# Altium PCB PCB1.PcbDoc
Units mm, origin at the board's own origin, x right, y up, seen from the top; angles counter-clockwise.
Board outline 60 x 72.9 mm, 2 copper layers (Top Layer, Bottom Layer); 114 components, 58 nets, 284 pads, 61 vias.
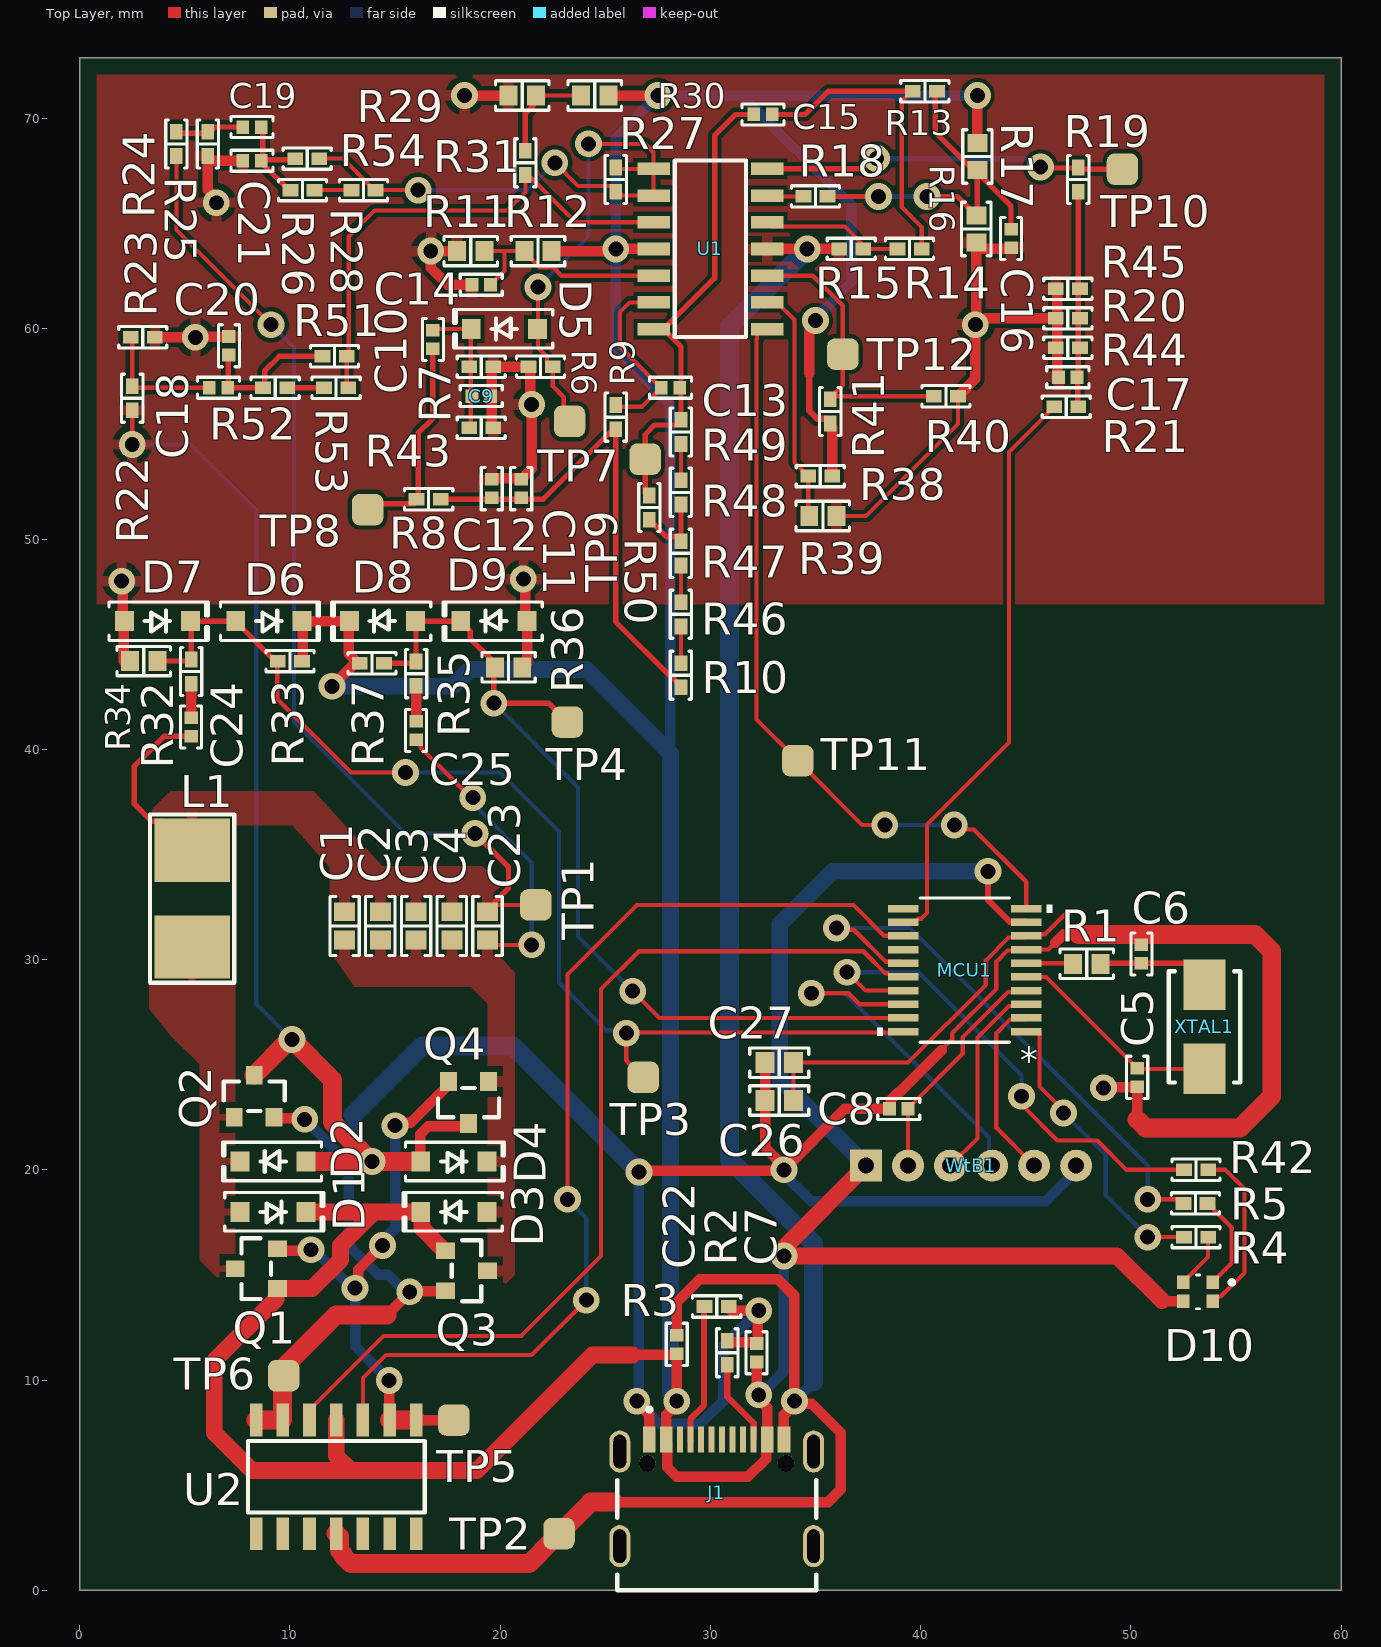
[diagram p0: Top Layer view]
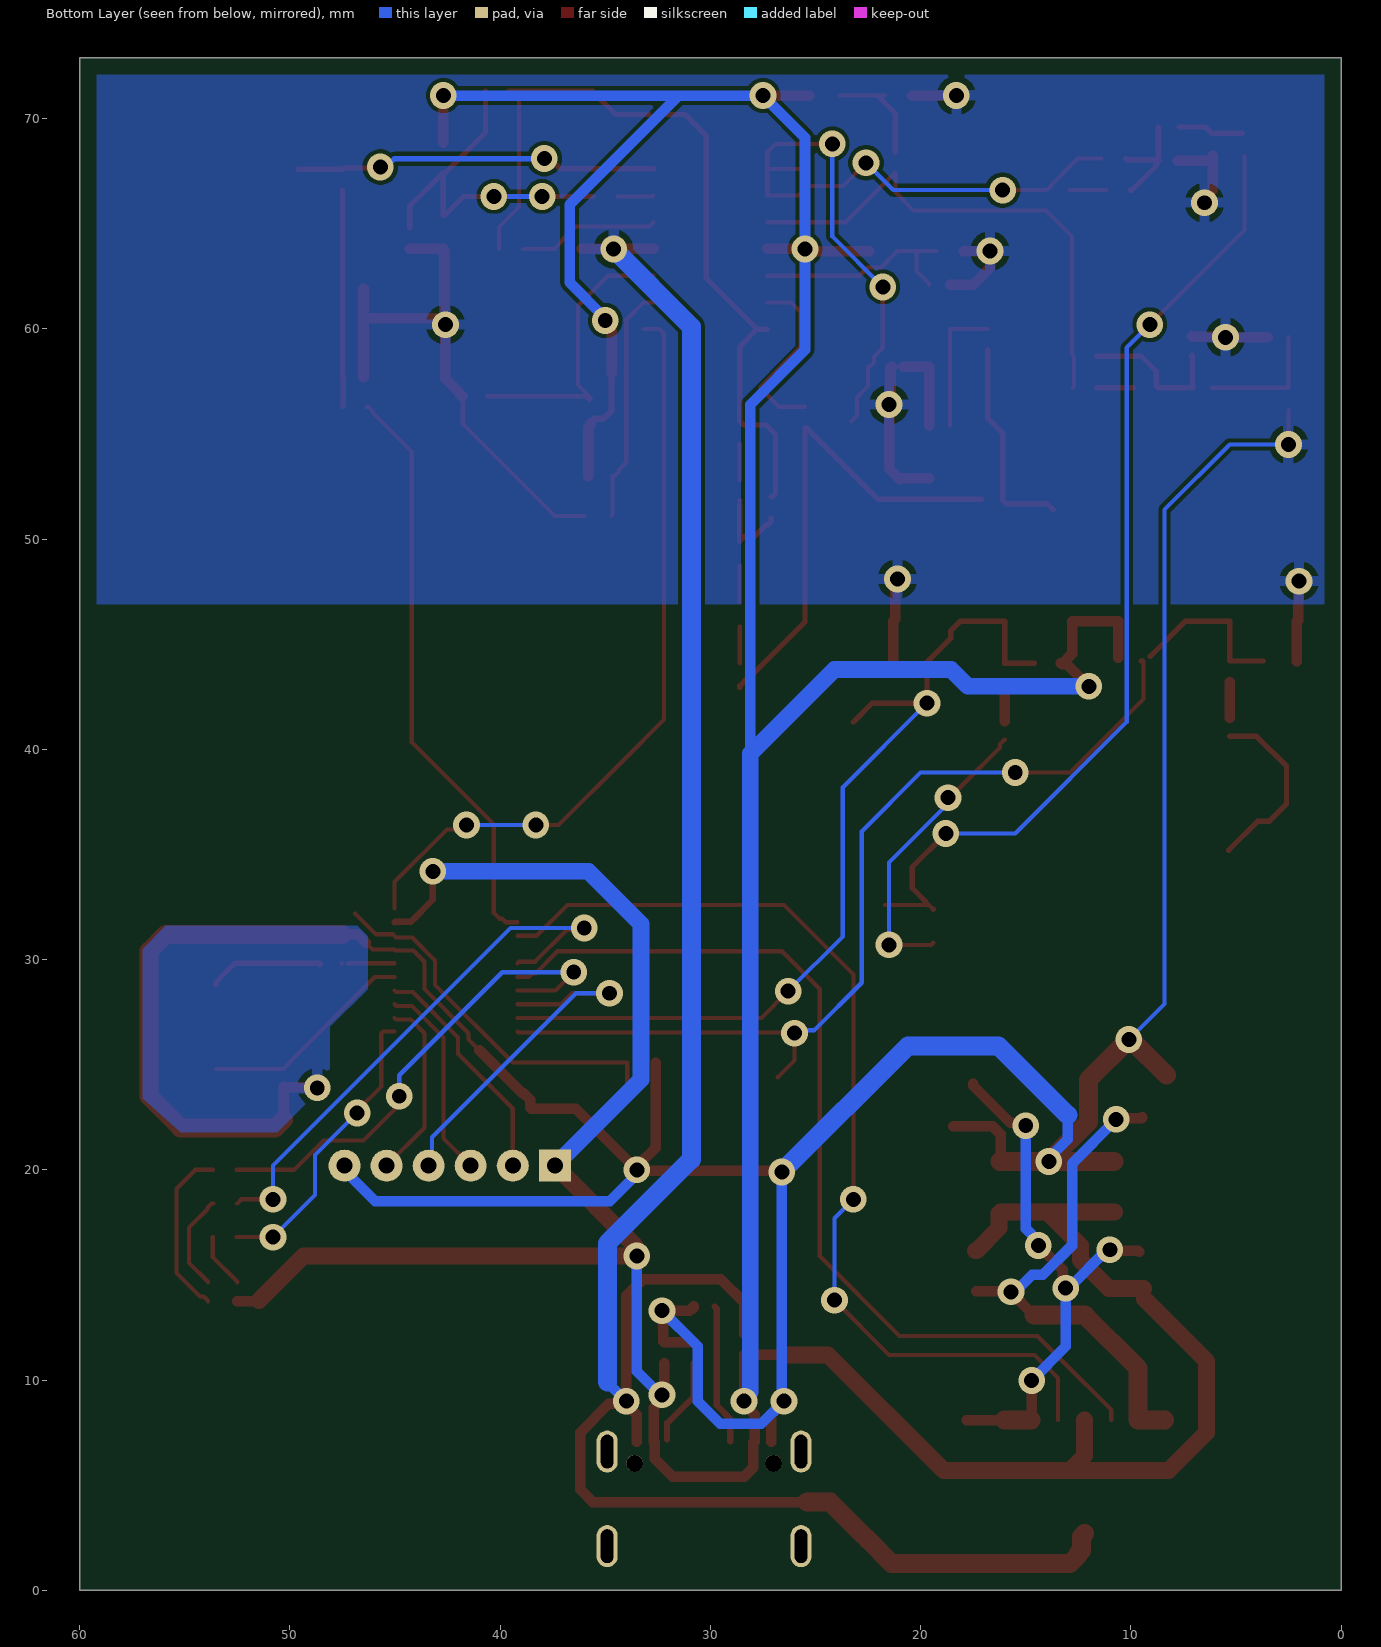
[diagram p1: Bottom Layer view, seen from below]

## Layer stack, top to bottom
Top Solder: solder mask 0.0102, Solder Resist, Dk 3.5
Top Layer: signal copper 0.0356
Dielectric 1: dielectric 0.32, FR-4, Dk 4.8
Bottom Layer: signal copper 0.0356
Bottom Solder: solder mask 0.0102, Solder Resist, Dk 3.5

## Board outline
0,0 0,72.9 60,72.9 60,0

## Design rules (kind name [scope] priority, off if disabled: settings)
BoardOutlineClearance [All] p1: gap=0.8 ignorepadtopadclearanceinfootprint=FALSE
Clearance [All] p1: gap=0.2 ignorepadtopadclearanceinfootprint=TRUE
PolygonConnect [All] p1: connectstyle=Relief reliefconductorwidth=0.5 reliefentries=4 polygonreliefangle="90 Angle" airgapwidth=0.3
RoomDefinition MSU_and_periphery [InComponentClass('MSU_and_periphery')] p1: confinementstyle=ConfineIn formatcopy=TRUE lockcomponents=FALSE outline 136.2,19 275.8,19 275.8,40.971 136.2,40.971
RoomDefinition ASK_Demodulation_and_thermistor_control [InComponentClass('ASK_Demodulation_and_thermistor_control')] p2: confinementstyle=ConfineIn formatcopy=TRUE lockcomponents=FALSE outline 136.243,-6.476 491.716,-6.476 491.716,4.954 136.243,4.954
RoomDefinition H-Bridge [InComponentClass('H-Bridge')] p3: confinementstyle=ConfineIn formatcopy=TRUE lockcomponents=FALSE outline 136.243,6.224 304.518,6.224 304.518,17.654 136.243,17.654
RoutingVias [All] p1: holewidth=0.711 width=1.27 viastyle="Through Hole" minholewidth=0.711 minwidth=1.27 maxholewidth=0.711 maxwidth=1.27
SilkToSilkClearance [All] p1: silktosilkclearance=0.1
SilkToSolderMaskClearance [IsPad] p1: minsilkscreentomaskgap=0.1 clearancetoexposedcopper=TRUE
SolderMaskExpansion [All] p1: expansion=0.102 istentingtop=FALSE
Width Width_ASK [InNet('ASK_Demod')] p1: maxlimit=0.2 minlimit=0.2 preferedwidth=0.2
Width Width_5VA [InNet('5VA')] p2: maxlimit=0.8 minlimit=0.3 preferedwidth=0.5
Width Width_+5 [InNet('+5')] p3: maxlimit=0.8 minlimit=0.3 preferedwidth=0.5
Width [All] p4: maxlimit=0.9 minlimit=0.2 preferedwidth=0.5
28 further rules are at their usual default settings.

## Classes and differential pairs
component class MSU_and_periphery: C5 C6 C7 C8 C22 C26 C27 J1 MCU1 R1 R2 R3 R4 R5 R42 WtB1 XTAL1
component class H-Bridge: C1 C2 C3 C4 C23 C24 C25 D1 D2 D3 D4 D6 D7 D8 D9 L1 Q1 Q2 Q3 Q4 R32 R33 R34 R35 R36 R37 TP1 TP2 TP3 TP4 TP5 TP6 U2
component class ASK_Demodulation_and_thermistor_control: C9 C10 C11 C12 C13 C14 C15 C16 C17 C18 C19 C20 C21 D5 R6 R7 R8 R9 R10 R11 R12 R13 R14 R15 R16 R17 R18 R19 R20 R21 R22 R23 R24 R25 R26 R27 R28 R29 R30 R31 R38 R39 R40 R41 R43 R44 R45 R46 R47 R48 R49 R50 R51 R52 R53 R54 TP7 TP8 TP9 TP10 TP11 TP12 U1

## Components (designator, comment, footprint, x,y, rotation, side; value= is the part's Value field where it differs from the comment)
C1 "Cap" "CAP 0603_1608" 12.6,31.6 r90 top value=68nF
C2 "Cap" "CAP 0603_1608" 14.3,31.6 r90 top value=68nF
C3 "Cap" "CAP 0603_1608" 16,31.6 r90 top value=2nF
C4 "Cap" "CAP 0603_1608" 17.7,31.6 r90 top value=2nF
C5 "Cap" "CAP 0402_1005" 50.3,24.4 r270 top value=20pF
C6 "Cap" "CAP 0402_1005" 50.5,30.26 r90 top value=20pF
C7 "Cap" "CAP 0402_1005" 32.2,11.3 r90 top value=4.7uF
C8 "Cap" "CAP 0402_1005" 38.96,22.9 r0 top value=0.1uF
C9 "Cap" "CAP 0402_1005" 19.1,56.8 r0 top value=1nF
C10 "Cap" "CAP 0402_1005" 16.8,59.5 r270 top value=0.47uF
C11 "Cap" "CAP 0402_1005" 21,52.4 r270 top value=10nF
C12 "Cap" "CAP 0402_1005" 19.6,52.4 r90 top value=1nF
C13 "Cap" "CAP 0402_1005" 28.1,57.2 r0 top value=0.47nF
C14 "Cap" "CAP 0402_1005" 19.1,62.1 r0 top value=0.1uF
C15 "Cap" "CAP 0402_1005" 32.5,70.2 r0 top value=0.1uF
C16 "Cap" "CAP 0402_1005" 44.3,64.3 r270 top value=0.1uF
C17 "Cap" "CAP 0402_1005" 47,57.7 r180 top value=1nF
C18 "Cap" "CAP 0402_1005" 6.6,57.2 r0 top value=47nF
C19 "Cap" "CAP 0402_1005" 8.2,69.6 r0 top value=47nF
C20 "Cap" "CAP 0402_1005" 7.1,59.2 r270 top value=1nF
C21 "Cap" "CAP 0402_1005" 8.2,68 r180 top value=1nF
C22 "Cap" "CAP 0402_1005" 28.4,11.7 r90 top value=4.7uF
C23 "Cap" "CAP 0603_1608" 19.4,31.6 r270 top value=0.68nF
C24 "Cap" "CAP 0402_1005" 5.3,41.06 r90 top value=4.7nF
C25 "Cap" "CAP 0402_1005" 16,40.9 r90 top value=4.7nF
C26 "Cap" "CAP 0603_1608" 33.275,23.3 r180 top value=1.5uF
C27 "Cap" "CAP 0603_1608" 33.275,25.1 r0 top value=330nF
D1 "D Schottky" SOD-123 9.2,18 r0 top
D2 "D Schottky" SOD-123 9.2,20.4 r180 top
D3 "D Schottky" SOD-123 17.8,18 r180 top
D4 "D Schottky" SOD-123 17.8,20.4 r0 top
D5 "Diode" SOD-123 20.2,60 r180 top
D6 "D Schottky" SOD-123 9,46.1 r0 top
D7 "D Schottky" SOD-123 3.7,46.1 r0 top
D8 "D Schottky" SOD-123 14.4,46.1 r180 top
D9 "D Schottky" SOD-123 19.7,46.1 r180 top
D10 "EAST1616RGBA3" LED_EAST1616RGBA3 53.2,14.2 r0 top
J1 "USB4800-03-A_REVA" GCT_USB4800-03-A_REVA 30.3,2.1 r0 top
L1 "Inductor" Charger_Coil1 5.35,32.9 r90 top value=12.5uH
MCU1 "STM8S003F3P6" TSSOP20 42.1,29.5 r180 top
Q1 "MOSFET-N" "DIODES SOT-23-3" 8.4,15.3 r180 top
Q2 "MOSFET-N" "DIODES SOT-23-3" 8.3,23.5 r90 top
Q3 "MOSFET-N" "DIODES SOT-23-3" 18.4,15.2 r0 top
Q4 "MOSFET-N" "DIODES SOT-23-3" 18.5,23.2 r270 top
R1 "Res1" "RES 0603_1608" 47.9,29.8 r180 top value=390
R2 "Res1" "RES 0402_1005" 30.8,11.3 r90 top value=5.1K
R3 "Res1" "RES 0402_1005" 30.3,13.5 r0 top value=5.1K
R4 "Res1" "RES 0402_1005" 53.1,16.8 r180 top value=1K
R5 "Res1" "RES 0402_1005" 53.075,18.4 r180 top value=1K
R6 "Res1" "RES 0402_1005" 21.925,58.2 r180 top value=6.8K
R7 "Res1" "RES 0402_1005" 19.1,58.2 r0 top value=36K
R8 "Res1" "RES 0402_1005" 16.6,51.9 r180 top value=4.3K
R9 "Res1" "RES 0402_1005" 25.5,55.8 r90 top value=2.4K
R10 "Res1" "RES 0402_1005" 28.6,43.525 r90 top value=62K
R11 "Res1" "RES 0603_1608" 18.6,63.7 r0 top value=5.9K
R12 "Res1" "RES 0603_1608" 21.8,63.7 r0 top value=5.9K
R13 "Res1" "RES 0402_1005" 40.2,71.3 r180 top value=10K
R14 "Res1" "RES 0402_1005" 39.475,63.8 r180 top value=10K
R15 "Res1" "RES 0402_1005" 36.7,63.8 r180 top value=1M
R16 "Res1" "RES 0603_1608" 42.65,64.75 r270 top value=5.9K
R17 "Res1" "RES 0603_1608" 42.7,68.2 r270 top value=5.9K
R18 "Res1" "RES 0402_1005" 35,66.3 r180 top value=10K
R19 "Res1" "RES 0402_1005" 47.5,67.1 r270 top value=7.5K
R20 "Res1" "RES 0402_1005" 47,60.5 r0 top value=36K
R21 "Res1" "RES 0402_1005" 46.925,56.3 r180 top value=100
R22 "Res1" "RES 0402_1005" 2.5,56.7 r270 top value=62K
R23 "Res1" "RES 0402_1005" 3,59.6 r0 top value=10K
R24 "Res1" "RES 0402_1005" 4.6,68.8 r90 top value=36K
R25 "Res1" "RES 0402_1005" 6.1,68.8 r90 top value=10K
R26 "Res1" "RES 0402_1005" 10.6,66.6 r0 top value=62K
R27 "Res1" "RES 0402_1005" 25.5,67.1 r90 top value=22K
R28 "Res1" "RES 0402_1005" 13.5,66.6 r0 top value=62K
R29 "Res1" "RES 0603_1608" 21.05,71.1 r180 top value=5.9K
R30 "Res1" "RES 0603_1608" 24.5,71.1 r0 top value=5.9K
R31 "Res1" "RES 0402_1005" 21.2,67.9 r270 top value=22K
R32 "Res1" "RES 0402_1005" 5.3,43.7 r270 top value=36K
R33 "Res1" "RES 0402_1005" 10,44.2 r180 top value=3.9K
R34 "Res1" "RES 0603_1608" 3.05,44.2 r0 top value=5.11K
R35 "Res1" "RES 0402_1005" 16,43.6 r90 top value=36K
R36 "Res1" "RES 0603_1608" 20.4,43.9 r180 top value=5.11K
R37 "Res1" "RES 0402_1005" 13.9,44.1 r180 top value=3.9K
R38 "Res1" "RES 0402_1005" 35.225,53 r180 top value=2.4K
R39 "Res1" "RES 0603_1608" 35.35,51.1 r0 top value=5.9K
R40 "Res1" "RES 0402_1005" 41.2,56.8 r180 top value=10K
R41 "Res1" "RES 0402_1005" 35.7,56.075 r90 top value=10K
R42 "Res1" "RES 0402_1005" 53.1,20 r0 top
R43 "Res1" "RES 0402_1005" 19.1,55.3 r0 top value=36K
R44 "Res1" "RES 0402_1005" 47,59.1 r0 top value=36K
R45 "Res1" "RES 0402_1005" 47,61.9 r0 top value=36K
R46 "Res1" "RES 0402_1005" 28.6,46.425 r90 top value=62K
R47 "Res1" "RES 0402_1005" 28.6,49.325 r90 top value=22K
R48 "Res1" "RES 0402_1005" 28.6,52.225 r90 top value=10K
R49 "Res1" "RES 0402_1005" 28.6,55.1 r90 top value=3.9K
R50 "Res1" "RES 0402_1005" 27.1,51.5 r90 top value=3.9K
R51 "Res1" "RES 0402_1005" 12.125,58.7 r0 top value=5.1K
R52 "Res1" "RES 0402_1005" 9.3,57.2 r0 top value=62K
R53 "Res1" "RES 0402_1005" 12.2,57.2 r0 top value=62K
R54 "Res1" "RES 0402_1005" 10.825,68.1 r0 top value=5.1K
TP1 "TP" Testpoint1 21.7,32.6 r0 top
TP2 "TP" Testpoint1 22.8,2.7 r90 top
TP3 "TP" Testpoint1 26.8,24.4 r90 top
TP4 "TP" Testpoint1 23.2,41.3 r90 top
TP5 "TP" Testpoint1 17.8,8.1 r90 top
TP6 "TP" Testpoint1 9.7,10.2 r0 top
TP7 "TP" Testpoint1 23.3,55.6 r90 top
TP8 "TP" Testpoint1 13.7,51.4 r90 top
TP9 "TP" Testpoint1 26.9,53.8 r90 top
TP10 "TP" Testpoint1 49.6,67.6 r90 top
TP11 "TP" Testpoint1 34.16,39.46 r90 top
TP12 "TP" Testpoint1 36.3,58.8 r90 top
U1 "LM324N" LM324NSR 30,63.8 r0 top
U2 "LM324N" LM324NSR 12.2,5.4 r270 top
WtB1 "" 6W_connector 37.4,20.2 r0 top
XTAL1 "8MHz" "NDK NX5032GA" 53.5,26.8 r90 top

## Footprints (in the part's own frame and the unit in brackets; to place one, negate y for a bottom-side part, rotate by r counter-clockwise, add the part's x,y. Pads: shape width x height; smd on the part's side, far side on the other; paste and mask are expansions set on the pad)
6W_connector [mil] "Wire to board connector 6pin"
  rect 60x60 hole 30: 1(0,0)
  round 60 hole 30: 2(78.74,0) 3(157.48,0) 4(236.22,0) 5(314.96,0) 6(393.7,0)
"CAP 0402_1005" [mm] "Chip Capacitor, 2-Leads, Body 1.02x0.51mm, IPC Medium Density"
  rect 0.6x0.64 smd: 1(-0.44,0) 2(0.44,0)
  silkscreen extent -1,-0.5 1,0.5, body extent -0.5,-0.26 0.5,0.26, height 0.52
"CAP 0603_1608" [mm] "Chip Capacitor, 2-Leads, Body 1.60x0.80mm, IPC Medium Density"
  rect 0.9x1 smd: 1(-0.675,0) 2(0.675,0)
  silkscreen extent -1.4,-0.7 1.4,0.7, body extent -0.8,-0.41 0.8,0.41, height 0.82
Charger_Coil1 [mm]
  rect 3x3.6 smd: 1(-2.3,0) 2(2.3,0)
  silkscreen extent -4,-2 4,2
"DIODES SOT-23-3" [mm] "SOT23, 3-Leads, Body 2.90x2.40mm, Pitch 0.95mm, IPC Medium Density"
  rect 0.9x0.8 smd: 1(-1,0.95) 2(-1,-0.95) 3(1,0)
  silkscreen extent -0.7,-1.45 0.7,1.45, body extent -1.41,-1.45 1.41,1.45, height 1.5
GCT_USB4800-03-A_REVA [mm]
  rect 0.6x1.25 smd: A1_B12(-3.2,5.075) A4_B9(-2.4,5.075) B1_A12(3.2,5.075) B4_A9(2.4,5.075)
  rect 0.3x1.25 smd: A5(-1.25,5.075) A6(-0.25,5.075) A7(0.25,5.075) A8(1.25,5.075) B5(1.75,5.075) B6(0.75,5.075) B7(-0.75,5.075) B8(-1.75,5.075)
  oval 1x2 hole 0.6 slot 1.6 at 90 deg: S1(-4.61,0) S2(4.61,0) S3(-4.61,4.5) S4(4.61,4.5)
  round 0.8 hole 0.8 unplated: ""(-3.3,3.94) ""(3.3,3.94)
  silkscreen extent -4.73,-2.1 4.73,6.6, body extent -4.73,-2.9 4.73,5.5, height 5.38
LED_EAST1616RGBA3 [mm]
  rect 0.6x0.65 smd: 1(0.7,0.45) 2(-0.7,0.45) 3(0.7,-0.45) 4(-0.7,-0.45)
  silkscreen extent -0.08,-0.8 1.7,0.8, body extent -0.8,-0.8 0.8,0.8, height 0.35
LM324NSR [mm]
  rect 1.55x0.6 smd: 1(-2.7,3.81) 2(-2.7,2.54) 3(-2.7,1.27) 4(-2.7,0) 5(-2.7,-1.27) 6(-2.7,-2.54) 7(-2.7,-3.81) 8(2.7,3.81) 9(2.7,2.54) 10(2.7,1.27) 11(2.7,0) 12(2.7,-1.27) 13(2.7,-2.54) 14(2.7,-3.81)
  silkscreen extent -1.7,-4.19 1.7,4.21
"NDK NX5032GA" [mm] "Crystal, 2-Leads, Body 5.00x3.20mm, IPC Medium Density"
  rect 2.4x2 smd: 1(-2,0) 2(2,0)
  silkscreen extent -2.65,-1.7 2.65,1.7, body extent -2.5,-1.6 2.5,1.6, height 1.2
"RES 0402_1005" [mm] "Chip Resistor, 2-Leads, Body 1.0x0.5mm, IPC Medium Density"
  rect 0.75x0.6 smd: 1(-0.575,0) 2(0.575,0)
  silkscreen extent -1.14,-0.51 1.14,0.51, body extent -0.5,-0.25 0.5,0.25, height 0.35
"RES 0603_1608" [mm] "Chip Resistor, 2-Leads, Body 1.60x0.80mm, IPC Medium Density"
  rect 0.85x0.95 smd: 1(-0.65,0) 2(0.65,0)
  silkscreen extent -1.27,-0.7 1.27,0.7, body extent -0.8,-0.4 0.8,0.4, height 0.45
SOD-123 [mm] "SOD, 2-Leads, Body 1.55x3.70mm, IPC Medium Density"
  rect 0.9x0.95 smd: 1(-1.575,0) 2(1.575,0)
  silkscreen extent -2.3,-0.92 2.41,0.92, body extent -1.86,-0.78 1.86,0.77, height 1.35
Testpoint1 [mm]
  rrect50% 1.5x1.5 smd: 1(0,0)
TSSOP20 [mm]
  rect 1.462x0.355 smd paste+0 mask+0: 1(-2.921,2.925) 2(-2.921,2.275) 3(-2.921,1.625) 4(-2.921,0.975) 5(-2.921,0.325) 6(-2.921,-0.325) 7(-2.921,-0.975) 8(-2.921,-1.625) 9(-2.921,-2.275) 10(-2.921,-2.925) 11(2.921,-2.925) 12(2.921,-2.275) 13(2.921,-1.625) 14(2.921,-0.975) 15(2.921,-0.325) 16(2.921,0.325) 17(2.921,0.975) 18(2.921,1.625) 19(2.921,2.275) 20(2.921,2.925)
  silkscreen extent -4.16,-3.43 4.16,3.43, body extent -3.3,-3.3 3.3,3.3, height 1.2

## Part data
C1 C2 C3 C4 C5 C6 C7 C8 C9 C10 C11 C12 C13 C14 C15 C16 C17 C18 C19 C20 C21 C22 C23 C24 C25 C26 C27: "Capacitor", LatestRevisionDate=17-Jul-2002, LatestRevisionNote="Re-released for DXP Platform.", PackageDescription="Radial Cap, Thru-Hole; 2 Leads; 0.3 in Pin Spacing", PackageReference=RAD-0.3, Published=8-Jun-2000, Publisher="Altium Limited"
D1 D2 D3 D4 D6 D7 D8 D9: "Schottky Diode", Code_JEDEC=DO-214-AA, LatestRevisionDate=17-Jul-2002, LatestRevisionNote="Re-released for DXP Platform.", PackageDescription="DO-214-AA/SMB; 2 C-Bend Leads; Body 5.3 x 3.6 mm, inc. leads (LxW)", PackageReference=SMB, Published=8-Jun-2000, Publisher="Altium Limited"
D5: "Default Diode", Code_JEDEC=DO-214-AB, LatestRevisionDate=17-Jul-2002, LatestRevisionNote="Re-released for DXP Platform.", PackageDescription="DO-214-AB/SMC; 2 C-Bend Leads; Body 7.9 x 5.9 mm, inc. leads (LxW)", PackageReference=SMC, PackageVersion=Sep-1996, Published=8-Jun-2000, Publisher="Altium Limited"
D10: "Red, Green, Blue (RGB) - LED Indication - Discrete 1.95V Red, 2.8V Green, 2.8V Blue 0606 (1616 Metric)", Package="0606 Everlight", Availability="In Stock", Check_prices=https://www.snapeda.com/parts/EAST1616RGBA3/Everlight+Electronics+Co+Ltd/view-part/?ref=eda, MF="Everlight Electronics", MP=EAST1616RGBA3, Price=None, Purchase-URL=https://pricing.snapeda.com/search/part/EAST1616RGBA3/?ref=eda, SnapEDA_Link=https://www.snapeda.com/parts/EAST1616RGBA3/Everlight+Electronics+Co+Ltd/view-part/?ref=snap
J1: "USB-C (USB TYPE-C) USB 2.0 Receptacle Connector 24 (16+8 Dummy) Position Surface Mount, Right Angle; Through Hole", Package=None, Availability="In Stock", Check_prices=https://www.snapeda.com/parts/USB4800-03-A/Global+Connector+Technology/view-part/?ref=eda, MF="Global Connector Technology", MP=USB4800-03-A, Price=None, Purchase-URL=https://pricing.snapeda.com/search/part/USB4800-03-A/?ref=eda, SnapEDA_Link=https://www.snapeda.com/parts/USB4800-03-A/Global+Connector+Technology/view-part/?ref=snap
MCU1: "No Description Available", Mfr_Name=STMicroelectronics, RefDes=RefDes, Type=Type
Q1 Q2 Q3 Q4: "N-Channel MOSFET", LatestRevisionDate=17-Jul-2002, LatestRevisionNote="Re-released for DXP Platform.", PackageDescription="TO, Flat Index; 3 In-Line, Axial Leads; Body Dia. 4.6mm; Lead Dia. 0.5 mm (max)", PackageReference=E3, PackageVersion=1995/1996, Published=8-Jun-2000, Publisher="Altium Limited"
R1 R2 R3 R4 R5 R6 R7 R8 R9 R10 R11 R12 R13 R14 R15 R16 R17 R18 R19 R20 R21 R22 R23 R24 R25 R26 R27 R28 R29 R30 R31 R32 R33 R34 R35 R36 R37 R38 R39 R40 R41 R43 R44 R45 R46 R47 R48 R49 R50 R51 R52 R53 R54: "Resistor", LatestRevisionDate=17-Jul-2002, LatestRevisionNote="Re-released for DXP Platform.", PackageDescription="Axial Device, Thru-Hole; 2 Leads; 0.3 in Pin Spacing", PackageReference=AXIAL-0.3, Published=8-Jun-2000, Publisher="Altium Limited"
R42: library part 5112, "0402 JUMPER ON TAPE AND REEL", Device Package="0402 (1005 Metric)", Manufacturer="Keystone Electronics", Power (Watts)="0.5W, 1/2W", Supplier Device Package=0402, Supplier Part Number 1=36-5112-1-ND, Tolerance=Jumper, ComponentLink1Description=Datasheet, ComponentLink1URL=http://www.keystoneelectronics.net/ENG._DEPT/WEB_ORACLE/PDF/PDF%20CAT%20NO%20DRAWINGS/5000-5999/5112.PDF, ComponentLink2Description="DigiKey Link", ComponentLink2URL=http://digikey.com/product-detail/en/keystone-electronics/5112/36-5112-1-ND/9921855, Composition="Metal Element", Height - Seated (Max)="0.020\" (0.50mm)", LastUpdated="02.09.2020 1:07:49", Lifecycle Status=Active, Minimum Order=1, Number of Terminations=2, Package / Case="0402 (1005 Metric)", Packaging=TapeAndReel, Part Number=5112, Part Status=Active, PartId=12597, Price=0.19, Series=-, Size / Dimension="0.039\" L x 0.020\" W (1.00mm x 0.50mm)", Supplier 1=DigiKey
TP1 TP2 TP3 TP4 TP5 TP6 TP7 TP8 TP9 TP10 TP11 TP12: library part Testpoint1
U1 U2: "No Description Available", Mfr_Name="Texas Instruments", RefDes=RefDes, Type=Type
WtB1: library part WtB_6_connector, "Wire to board connector 6pin"
XTAL1: library part ECS-80-18-5PX-TR
L1: Code_IEC=1005, Code_JEITA=0402, LatestRevisionDate=29-May-2009, LatestRevisionNote="IPC-7351 Footprint Added.", PackageDescription="Chip Inductor", PackageReference=0402-A, Published=8-Jun-2000, Publisher="Altium Limited"

## Via types
v1: diameter 1.27, hole 0.711, Top Layer to Bottom Layer, 61 vias

## Nets (pads, with @x,y where several pads share a name; then routed paths per layer and width w, separated by ;. In a path a pad name is that pad's centre, name@x,y a point inside that pad or via, vN(x,y) a via of type N, cw(c..) or ccw(c..) an arc to the next point about the centre after c; other vN are vias at no path point)
5VA: C7.1 C22.1 D1.2 D3.2 D6.2 D8.2 D10.4 J1.A4_B9 J1.B4_A9 MCU1.9 Q1.1 Q3.1 R12.2 R17.1 R30.2 R33.1 R37.2 R38.1 R41.1 U1.4 U2.4 WtB1.1 | length 262.6
  Top Layer w0.3: 34.7,57.895 34.7,56.1 35.075,55.725 35.55,55.725 35.7,55.575 R41.1 ; v1(43.2,34.2) 43.2,32.843 44.24,31.802 44.994,31.802 MCU1.9
  Top Layer w0.5: R33.1@10.6,44.35 10.6,46.1 12.8,46.1 12.8,44.55 13.25,44.1 R37.2 13.275,44.05 13.05,44.05 v1(12,43) ; R12.2 25.4,63.7 v1(25.5,63.8) U1.4 ; R30.2@25.3,71.1 v1(27.5,71.1) ; 26.3,11.2 28.4,11.2 v1(28.4,9) 28.4,8.851 27.9,8.351 27.9,7.075 27.95,7.025 27.95,5.85 28.4,5.4 31.786,5.4 32.65,6.264 32.65,7.025 32.7,7.075 32.7,8.692 32.3,9.092 v1(32.3,9.3) 32.2,9.4 C7.1@32.2,10.81 ; 34.7,57.895 34.7,59.892 35,60.192 v1(35,60.4) ; R41.1 35.7,55.425 35.8,55.325 R38.1 ; R17.1 v1(42.7,71.1) ; 51.475,13.775 51.5,13.75 D10.4
  Top Layer w0.8: 9.35,13.85 6.4,10.9 6.4,7.5 8.2,5.7 12.9,5.7 ; Q1.1 11.05,14.35 12.4,15.7 12.4,16.4 14,18 ; D1.2 14,18 ; U2.4 12.2,6.4 12.9,5.7 ; Q3.1 17.35,16.15 16.275,17.225 16.275,17.925 16.2,18 14,18 ; 26.3,11.2 24.4,11.2 18.9,5.7 12.9,5.7 ; WtB1.1 33.59,16.39 33.59,15.99 v1(33.5,15.9) 49.35,15.9 51.475,13.775
  Bottom Layer w0.5: 28.1,39.8 28.1,56.4 25.5,59 v1(25.5,63.8) 25.5,69.1 v1(27.5,71.1) 31.5,71.1 ; v1@32.2,9.2 v1(32.3,9.3) 32.388,9.3 33.5,10.412 v1(33.5,15.9) ; v1(35,60.4) 35,60.512 36.7,62.212 36.7,65.9 31.5,71.1 ; v1(42.7,71.1) 31.5,71.1
  Bottom Layer w0.8: v1(12,43) 17.754,43 18.554,43.8 24.1,43.8 28.1,39.8 28.1,9.427 28.4,9.127 v1(28.4,9) ; WtB1.1 33.3,24.3 33.3,31.7 35.8,34.2 v1(43.2,34.2)
ASK_Demod: MCU1.12 R21.2 | length 27.9
  Top Layer w0.2: MCU1.12 39.733,31.775 39.905,31.948 40.034,31.948 40.3,32.213 40.3,36.422 44.2,40.322 44.2,54.15 46.075,56.025 46.075,56.1 46.275,56.3 R21.2
FOD_ADC_UTI: D8.1 D9.2 MCU1.19 R35.2 R36.2 R37.1 TP4.1 | length 43.7
  Top Layer w0.2: v1(26.3,28.5) 27.575,27.225 MCU1.19
  Top Layer w0.254: R37.1@14.6,44.1 16,44.1 R35.2 16,46.1 18.1,46.1 18.573,45.627 18.573,45.277 R36.2@19.7,44.15 ; R36.2@19.7,44.1 v1(19.7,42.2) 22.3,42.2 TP4.1
  Bottom Layer w0.2: v1(19.7,42.2) 23.7,38.2 23.7,31.1 v1(26.3,28.5)
FOD_ADC_UTL: D6.1 D7.2 MCU1.20 R32.1 R33.2 R34.2 TP3.1 | length 52.9
  Top Layer w0.2: R33.2 9.4,44.175 9.4,42.4 12.9,38.9 v1(15.5,38.9) ; TP3.1 26,25.2 v1(26,26.5) 26.038,26.538 39.142,26.538 MCU1.20
  Top Layer w0.254: R34.2 5.3,44.2 R32.1 5.3,46.1 7.4,46.1 R33.2@9.077,44.423 ; R33.2 R33.2@9.5,44.2
  Bottom Layer w0.2: v1(15.5,38.9) 20,38.9 22.8,36.1 22.8,28.9 25.065,26.635 25.865,26.635 v1(26,26.5)
LED_B: D10.3 R42.2 | length 8.2
  Top Layer w0.2: R42.2 54.5,20 55.4,19.1 55.4,15.101 54.274,13.975 54.1,13.975 53.9,13.775 D10.3
LED_G: D10.2 R4.1 | length 2.6
  Top Layer w0.2: D10.2 52.5,14.675 53.675,15.85 R4.1
LED_R: D10.1 R5.1 | length 4.6
  Top Layer w0.2: R5.1 53.725,18.4 53.925,18.2 53.925,18.125 54.8,17.25 54.8,15.575 53.9,14.675 D10.1
low-pass: C15.2 R13.2 R14.1 | length 15.2
  Top Layer w0.2: R13.2 39.565,71.3 39.55,71.3 39.35,71.1 39.35,71.085 39.1,70.835 39.1,65.8 40.05,64.85 R14.1
  Top Layer w0.254: C15.2 34.5,70.2 35.6,71.3 R13.2@39.565,71.3
NetC6_1: C6.1 R1.1 XTAL1.2 | length 5.5
  Top Layer w0.254: R1.1@48.59,29.76 R1.1 48.57,29.82 C6.1 52.627,29.82 53.5,28.947 XTAL1.2
NetC9_1: C9.1 C10.1 D5.2 R7.1 R43.1 | length 6.4
  Top Layer w0.2: C10.1@16.8,60 18.6,60 18.6,58.2 R43.1@18.6,55.4
NetC10_2: C10.2 R8.2 TP8.1 | length 10
  Top Layer w0.254: TP8.1 13.977,51.677 15.927,51.677 16.1,51.85 16.1,51.9 16.1,55.038 16.8,55.738 C10.2@16.8,59
NetC11_2: C11.2 C12.1 R8.1 R9.1 R10.1 | length 23.5
  Top Layer w0.254: R8.1@17.1,51.9 19.6,51.9 22.05,51.9 25.45,55.3 25.5,55.3 R9.1 25.5,46.063 28.165,43.398 28.227,43.398 28.6,43.025 R10.1
NetC16_1: C16.1 R13.1 R16.1 R17.2 R18.1 | length 17.5
  Top Layer w0.254: R18.1 v1(38,66.3) ; v1(40.3,66.3) 41.75,66.3 R16.1 42.7,65.4 R17.2@42.7,67.4 ; R13.1@40.7,71.3 40.7,69.35 42.65,67.4 R17.2@42.7,67.4 ; C16.1@44.3,64.8 44.3,65.85 42.75,67.4 R17.2@42.7,67.4
  Bottom Layer w0.254: v1(38,66.3) v1(40.3,66.3)
NetC17_1: C17.1 R19.2 R20.2 R21.1 R44.2 R45.2 | length 10.3
  Top Layer w0.254: C17.1 47.47,57.67 47.47,56.33 R21.1 ; C17.1@47.5,57.7 R19.2 R19.2@47.5,66.6
NetC18_1: C18.1 R22.1 R23.1 | length 6.1
  Top Layer w0.2: R23.1@2.5,59.6 R22.1 2.5,57.2 C18.1
NetC18_2: C18.2 C20.2 R51.1 R52.1 | length 7.2
  Top Layer w0.254: C20.2 7.07,58.73 7.07,57.23 C18.2 R52.1 8.8,57.275 8.8,58 9.5,58.7 R51.1 R51.1@11.625,58.7
NetC19_1: C19.1 R24.2 R25.2 | length 3.1
  Top Layer w0.254: R24.2@4.7,69.3 6.1,69.3 6.15,69.3 6.45,69.6 C19.1@7.7,69.6
NetC19_2: C19.2 C21.1 R26.1 R54.1 | length 5.2
  Top Layer w0.254: C21.1 8.813,67.827 8.813,67.737 9.95,66.6 R26.1 ; C19.2@8.7,69.6 8.7,68 8.75,68.05 10.2,68.05 R54.1
NetC24_2: C24.2 R32.2 | length 1.7
  Top Layer w0.5: C24.2 R32.2 R32.2@5.3,43.2
NetC25_2: C25.2 R35.1 | length 1.8
  Top Layer w0.5: C25.2 R35.1 R35.1@16,43.1
NetC26_1: C26.1 C27.2 MCU1.8 | length 18.3
  Top Layer w0.2: C26.1 C27.2 39.4,25.1 43.1,28.8 43.1,29.966 44.182,31.048 44.944,31.048 MCU1.8 ; MCU1.8@45.098,31.202 45.902,31.202 46.9,32.2
NetD1_1: D1.1 D2.2 L1.1 Q1.3 Q2.1
NetJ1_A5: J1.A5 R3.1 | length 6.7
  Top Layer w0.3: J1.A5@29.05,7.075 29.05,8.15 29.7,8.8 29.7,13.4 R3.1@29.8,13.5
NetJ1_B5: J1.B5 R2.1 | length 4.1
  Top Layer w0.3: R2.1@30.8,10.8 R2.1 30.8,9.205 32.06,7.945 J1.B5@32.06,7.175
NetMCU1_1: MCU1.1 R4.2 | length 14.2
  Top Layer w0.2: MCU1.1 45.575,26.575 45.652,26.498 45.652,23.97 46.8,22.822 v1(46.8,22.7) ; v1(50.8,16.8) R4.2
  Bottom Layer w0.2: v1(46.8,22.7) 48.8,20.7 48.8,18.8 v1(50.8,16.8)
NetMCU1_15: MCU1.15 R5.2 | length 26.7
  Top Layer w0.2: v1(36,31.5) 36.081,31.419 36.818,31.419 38.335,29.902 39.102,29.902 MCU1.15 ; v1(50.8,18.6) 52.3,18.6 R5.2
  Bottom Layer w0.2: v1(36,31.5) 39.5,31.5 50.8,20.2 v1(50.8,18.6)
NetMCU1_17: MCU1.17 R42.1 | length 23.8
  Top Layer w0.2: v1(36.5,29.4) 37.375,28.525 MCU1.17 ; v1(44.8,23.5) 45.005,23.295 45.005,22.895 46.5,21.4 48.4,21.4 49.8,20 R42.1
  Bottom Layer w0.2: v1(36.5,29.4) 39.9,29.4 44.8,24.5 v1(44.8,23.5)
NetQ1_2: Q1.2 Q4.2 TP5.1 U2.1 U2.2 | length 26
  Top Layer w0.5: Q1.2@9.6,16.1 9.65,16.15 10.95,16.15 v1(11,16.2) ; v1(13.1,14.375) 13.247,14.522 13.247,15.247 v1(14.4,16.4) ; v1(14.72,9.98) 14.72,8.12 U2.2 ; v1(15,22.1) 15.147,22.247 15.747,22.247 17.5,24 Q4.2@17.5,24.1 ; U2.1 TP5.1
  Top Layer w0.9: U2.2 U2.1
  Bottom Layer w0.5: v1(11,16.2) 11.137,16.2 12.963,14.375 v1(13.1,14.375) ; v1@13.1,14.2 13.1,11.6 v1(14.72,9.98) ; v1(14.4,16.4) 14.4,16.608 15,17.208 v1(15,22.1)
NetQ2_2: Q2.2 Q3.2 TP6.1 U2.6 U2.7 | length 24.9
  Top Layer w0.5: Q2.2@9.45,22.49 9.495,22.445 10.655,22.445 v1(10.7,22.4) ; 14.61,13.09 15.7,14.179 v1(15.7,14.2) 15.725,14.225 Q3.2@17.355,14.225
  Top Layer w0.9: U2.7 U2.6 9.655,8.105 9.655,10.555 12.19,13.09 14.61,13.09
  Bottom Layer w0.5: v1(10.7,22.4) 12.8,20.3 12.8,16.4 14.194,15.006 14.686,15.006 15.492,14.2 v1(15.7,14.2)
NetR10_2: R10.2 R46.1 | length 1.8
  Top Layer w0.2: R10.2 R46.1
NetR26_2: R26.2 R28.1 | length 1.8
  Top Layer w0.2: R26.2 R28.1
NetR29_1: R29.1 R30.1 R31.1 | length 5.2
  Top Layer w0.2: R29.1 R30.1
  Top Layer w0.254: R31.1@21.2,68.4 21.2,70.25 22,71.05 R29.1@22,71.1
NetR46_2: R46.2 R47.1 | length 1.7
  Top Layer w0.2: R46.2 R47.1
NetR47_2: R47.2 R48.1 R50.1 | length 3.7
  Top Layer w0.254: R50.1 27.1,50.85 27.273,50.677 27.348,50.677 27.919,50.106 28.427,50.106 R47.2@28.6,49.933 ; R47.2 R47.2@28.6,49.933 ; R48.1 R47.2@28.6,49.933
NetR48_2: R48.2 R49.1 | length 1.7
  Top Layer w0.2: R48.2 R49.1
NetR52_2: R52.2 R53.1 | length 1.8
  Top Layer w0.254: R52.2 R53.1
OA1_In+: R31.2 R51.2 R53.2 U1.3 | length 24.5
  Top Layer w0.2: R53.2 12.7,57.275 R51.2 12.8,58.8 12.8,64.4 14.031,65.631 20.331,65.631 21.2,66.5 21.2,67.4 21.25,67.4 23.58,65.07 U1.3 U1.3@27.27,65.1
OA1_In-: D5.1 R6.1 R27.1 R27.2 R28.2 R54.2 TP7.1 U1.1 U1.2 | length 39.7
  Top Layer w0.2: R54.2 12.524,68.1 13.8,66.824 13.8,66.8 14,66.6 R28.2 v1(16.1,66.6) ; v1(21.8,61.995) 21.8,59.1 22.225,58.675 22.225,58.4 22.425,58.2 R6.1 22.5,57.274 23.025,56.749 23.025,55.875 TP7.1 ; v1(22.6,67.9) 23.7,66.8 25.3,66.8 25.5,66.6 25.55,66.6 25.81,66.34 U1.2 U1.1 ; v1(24.2,68.8) 26.9,68.8 27.3,68.4 U1.1 ; R27.2@25.5,67.6 27.29,67.6 U1.1
  Bottom Layer w0.2: v1(16.1,66.6) 21.3,66.6 v1(22.6,67.9) ; v1(21.8,61.995) 21.8,62 24.2,64.4 v1(24.2,68.8)
OA2_In+: C14.2 R11.2 R12.1 U1.5 | length 10.4
  Top Layer w0.2: R11.2 20.2,63.7 ; C14.2@19.6,62.1 19.6,62.15 20.2,62.75 20.2,63.7 ; U1.5 22.92,62.53 22.525,62.925 21.901,62.925 21.895,62.93 21.87,62.93 21.15,63.65 R12.1 20.2,63.7
OA2_In-: C13.1 R9.2 U1.6 | length 8.7
  Top Layer w0.2: R9.2@25.5,56.3 26.75,56.3 27.6,57.15 27.6,57.2 27.6,57.25 25.7,59.15 25.7,60.8 26.16,61.26 U1.6
OA2_Out: C13.2 C15.1 R49.2 R50.2 TP9.1 U1.7 | length 22.7
  Top Layer w0.254: R50.2@27.1,52 27.073,52 26.9,52.173 TP9.1 26.9,54.978 27.349,55.427 28.427,55.427 28.6,55.6 28.6,59.165 U1.7@27.775,59.99 ; U1.7 U1.7@27.775,59.99 ; C15.1 31.2,70.2 30.2,69.2 30.2,62.415 U1.7@27.775,59.99
OA3_In+: R14.2 R15.1 U1.10 | length 6.8
  Top Layer w0.2: U1.10 32.9,64.87 36.404,64.87 37,64.274 37,64.25 37.4,63.85 37.4,63.8 R14.2
OA3_In-: R18.2 U1.9 | length 1.7
  Top Layer w0.2: U1.9 32.74,66.3 R18.2
OA3_Out: R19.1 TP10.1 U1.8 | length 17.3
  Top Layer w0.254: U1.8 37.135,67.61 37.625,68.1 v1(37.9,68.1) ; v1(45.7,67.7) 45.75,67.65 47.45,67.65 47.5,67.6 TP10.1
  Bottom Layer w0.254: v1(37.9,68.1) 45.025,68.1 45.425,67.7 v1(45.7,67.7)
OA4_In+: R40.2 R41.2 TP12.1 U1.12 | length 14.1
  Top Layer w0.2: U1.12 34.87,62.53 36.3,61.1 TP12.1 36.3,57.325 35.7,56.725 R41.2 35.85,56.8 R40.2 ; R41.2@35.75,56.6 R41.2@35.9,56.75
OA4_In-: R38.2 R39.1 U1.13 | length 11.3
  Top Layer w0.2: U1.13 33.175,61.26 34,60.435 34,53.65 34.375,53.275 34.375,53.2 34.575,53 R38.2 34.65,51.15 R39.1
OA4_Out: MCU1.10 TP11.1 U1.14 | length 36.7
  Top Layer w0.2: U1.14@33.175,59.99 U1.14 32.417,59.99 32.217,59.79 32.217,59.507 32.2,59.49 32.2,41.42 TP11.1 37.22,36.4 v1(38.3,36.4) ; v1(41.6,36.4) 41.805,36.195 42.527,36.195 45.021,33.701 MCU1.10
  Bottom Layer w0.2: v1(38.3,36.4) v1(41.6,36.4)
OSC_IN: C5.1 MCU1.5 XTAL1.1 | length 10.3
  Top Layer w0.2: MCU1.5 45.965,29.175 50.08,25.06 50.08,25.04 50.32,24.8 XTAL1.1
OSC_OUT: MCU1.6 R1.2 | length 2.3
  Top Layer w0.2: MCU1.6 47.225,29.825 R1.2 ; R1.2@47.525,29.825 R1.2@47.55,29.8
"PWM H-bridge Q14": MCU1.13 U2.3 | length 48
  Top Layer w0.2: U2.3 13.47,10.092 14.578,11.2 21.5,11.2 v1(24.1,13.8) ; v1(23.2,18.6) 23.2,29.3 26.5,32.6 36.8,32.6 38.265,31.135 39.169,31.135 MCU1.13
  Bottom Layer w0.2: v1(23.2,18.6) 24.1,17.7 v1(24.1,13.8)
"PWM H-bridge Q23": MCU1.16 U2.5 | length 45.7
  Top Layer w0.2: U2.5 10.93,8.575 13.265,10.91 14.455,12.1 21,12.1 24.8,15.9 24.8,28.6 26.6,30.4 37.271,30.4 38.324,29.348 38.453,29.348 38.625,29.175 MCU1.16
Qf_UTI: C1.1 C2.1 C3.1 C4.1 C23.2 C25.1 D3.1 D4.2 Q3.3 Q4.1 | length 14.2
  Top Layer w0.2: C25.1 16.02,40.46 16.22,40.26 16.22,40.094 17.925,38.389 18.614,37.7 v1(18.7,37.7) ; C23.2@19.4,30.8 19.5,30.7 v1(21.5,30.7)
  Bottom Layer w0.2: v1(18.7,37.7) 18.7,37.422 21.5,34.622 v1(21.5,30.7)
Qf_UTL: C1.2 C2.2 C3.2 C4.2 C23.1 C24.1 L1.2 R24.1 TP1.1 | length 55.5
  Top Layer w0.2: R24.1 4.6,64.7 v1(9.1,60.2) ; C23.1@19.4,32.4 19.6,32.6 19.65,32.6 TP1.1
  Top Layer w0.254: C24.1 4.02,40.62 2.6,39.2 2.6,37.4 3.427,36.573 3.977,36.573 L1.2 ; v1(18.8,36) 20.4,34.4 20.4,33.4 19.773,32.773 19.773,32.723 C23.1@19.65,32.6
  Bottom Layer w0.2: v1(9.1,60.2) 10.2,59.1 10.2,41.3 15.5,36 v1(18.8,36)
Reset: C8.2 MCU1.4 WtB1.2 | length 11.1
  Top Layer w0.2: WtB1.2 C8.2 39.4,22.92 42,25.52 42,26.3 44.157,28.457 44.953,28.457 MCU1.4
SWIM: MCU1.18 WtB1.4 | length 17.3
  Top Layer w0.2: v1(34.8,28.4) 36.572,28.4 37.097,27.875 MCU1.18
  Bottom Layer w0.2: v1(34.8,28.4) 36.4,28.4 43.248,21.552 43.248,20.352 WtB1.4
Tx_Coil_Out: C5.2 C6.2 C7.2 C8.1 C9.2 C11.1 C12.2 C14.1 C16.2 C17.2 C20.1 C21.2 C22.2 C26.2 C27.1 D2.1 D4.1 D7.1 D9.1 J1.A1_B12 J1.B1_A12 MCU1.7 Q2.3 Q4.3 R2.2 R3.2 R6.2 R7.2 R11.1 R15.2 R16.2 R20.1 R22.2 R23.2 R25.1 R29.2 R34.1 R36.1 R39.2 R40.1 R43.2 R44.1 R45.1 TP2.1 U1.11 U2.11 WtB1.6 | length 344
  Top Layer w0.2: v1(2.5,54.5) R22.2 ; R39.2 37.4,51.1 41.775,55.475 R40.1 ; 41,25.7 41.5,26.2 41.5,26.5 43.6,28.6 43.6,29.9 44.132,30.432 44.978,30.432 MCU1.7 46.075,30.475 46.4,30.8
  Top Layer w0.5: v1(2,48) 2.05,47.95 2.05,46.15 2.1,46.1 R34.1@2.1,44.2 ; R23.2@3.5,59.6 R23.2 v1(5.5,59.6) 5.52,59.62 7.08,59.62 C20.1 ; R25.1 6.1,66.608 6.5,66.208 v1(6.5,66) ; R25.1@6.325,68 C21.2 ; D4.1@16.2,20.4 16.2,21.7 16.58,22.08 Q4.3@18.45,22.08 ; R11.1 v1(16.7,63.7) 16.7,62.9 17.5,62.1 C14.1@18.6,62.1 ; v1(18.3,71.1) R29.2 ; C12.2@19.6,52.9 21.05,52.9 C11.1@21.1,52.95 ; R43.2@19.6,55.4 C9.2@19.6,56.75 ; C9.2@19.6,56.8 C9.2@19.6,56.75 ; 20.825,58.2 R7.2 19.6,58.2 C9.2@19.6,56.75 ; C11.1 21.02,52.84 21.07,52.89 21.07,52.91 21.5,53.34 v1(21.5,56.4) 21.433,56.467 21.433,58.15 21.383,58.2 R6.2 ; v1(21.1,48.1) 21.2,48 21.2,46.2 21.3,46.1 R36.1@21.3,44.1 ; 25.4,4.2 35.6,4.2 36.2,4.8 36.2,7.5 34.829,8.871 34.129,8.871 v1(34,9) ; v1(26.5,9) 26.5,8.951 27.1,8.351 J1.A1_B12@27.1,7.075 ; v1(26.6,19.9) 26.65,19.95 33.45,19.95 v1(33.5,20) ; C22.2@28.4,12.2 28.4,13.7 29.5,14.8 33.2,14.8 34,14 v1(34,9) ; R2.2@30.8,11.8 32.2,11.8 32.25,11.85 32.25,13.25 v1(32.3,13.3) 31,13.3 30.9,13.4 30.85,13.4 30.8,13.45 R3.2@30.8,13.5 ; C27.1 C26.2 32.6,21.059 33.5,20.159 v1(33.5,20) ; U1.11 v1(34.6,63.8) R15.2 ; J1.B1_A12@33.5,7.075 33.5,8.351 34,8.851 v1(34,9) ; 41,25.7 38.97,23.67 38.914,23.67 38.57,23.326 38.57,22.95 C8.1 36.4,22.9 v1(33.5,20) ; R40.1 41.85,56.8 41.9,56.85 41.9,56.925 42.6,57.625 v1(42.6,60.2) ; C16.2@44.3,63.8 42.7,63.8 42.65,63.75 42.65,60.25 v1(42.6,60.2) ; 46.4,30.8 46.8,31.2 47.5,31.2 ; C17.2@46.5,57.7 R20.1@46.5,60.5 ; R45.1@46.5,61.9 R20.1@46.5,60.5 ; v1(48.7,23.9) 48.73,23.93 50.27,23.93 C5.2 50.3,22.4 ; v1(42.6,60.2) 42.808,60.2 43.108,60.5 R20.1 R20.1@46.5,60.5
  Top Layer w0.9: Q2.3 10,26.2 v1(10.1,26.2) 12.025,24.275 12.025,22.275 v1(13.9,20.4) ; D2.1@10.8,20.4 v1(13.9,20.4) ; U2.11 12.35,2.55 12.35,1.899 12.52,1.729 12.52,1.656 12.901,1.275 21.375,1.275 22.5,2.4 TP2.1 24.3,4.2 25.4,4.2 ; D4.1 16.2,20.4 v1(13.9,20.4) ; v1@26.429,8.929 v1(26.5,9) ; 47.5,31.2 55.9,31.2 56.7,30.4 56.7,23.5 55.2,22 50.7,22 50.3,22.4
  Bottom Layer w0.2: v1(2.5,54.5) 5.3,54.5 8.4,51.4 8.4,27.882 10.082,26.2 v1(10.1,26.2)
  Bottom Layer w0.5: 13,22.6 13,21.459 13.9,20.559 v1(13.9,20.4) ; v1(26.6,19.9) 26.6,9.1 v1(26.5,9) 27.585,7.915 29.522,7.915 30.6,8.993 30.6,11.6 v1(32.3,13.3) ; v1(33.5,20) 33.5,19.792 34.792,18.5 45.949,18.5 47.4,19.951 WtB1.6 ; v1(34,9) 34.9,9.9
  Bottom Layer w0.9: 13,22.6 16.3,25.9 20.6,25.9 v1(26.6,19.9) ; v1(34.6,63.8) 30.9,60.1 30.9,20.5 34.9,16.5 34.9,9.9
UART_Rx: MCU1.2 WtB1.5 | length 8.8
  Top Layer w0.2: MCU1.2 44.944,27.148 44.248,27.148 43.6,26.5 43.6,22 WtB1.5
UART_Tx: MCU1.3 WtB1.3 | length 9.6
  Top Layer w0.2: WtB1.3 42.7,21.5 42.7,26.3 44.198,27.798 44.944,27.798 MCU1.3
pads on no net: J1. J1.A6 J1.A7 J1.A8 J1.B6 J1.B7 J1.B8 J1.S1 J1.S2 J1.S3 J1.S4 MCU1.11 MCU1.14 U2.8 U2.9 U2.10 U2.12 U2.13 U2.14

## Polygon pours and split planes (outlines as drawn)
Qf_UTI on Top Layer "QF_UTI_L01_P003" (solid, pour order 3): 19.4,27.9 19.4,13.7 20.7,15 20.7,29.4 19.3,30.8 11.61,30.8 13.08,28.7 18.6,28.7
Tx_Coil_Out on Top Layer "TX_COIL_OUT_L01_P010" (solid, pour order 10): 0,72.9 0,46.9 60,46.9 60,72.9
Qf_UTL on Top Layer "QF_UTL_L01_P004" (solid, pour order 4): 20.1,32.6 11.9,32.6 11.9,34.4 10.1,36.4 8.1,36.4 3.3,36.4 3.3,37 4.3,38 11.132,38 14.4,34.45 14.116,34.45 19.15,34.45 20.1,33.5
NetD1_1 on Top Layer "NETD1_1_L01_P001" (solid, pour order 1): 6.911,14.496 7.4,14.499 7.4,29.8 3.3,29.8 3.3,27.655 4.358,26.358 5.704,25.012 5.704,15.704
Tx_Coil_Out on Bottom Layer "TX_COIL_OUT_L02_P009" (solid, pour order 9): 0,72.9 0,46.9 60,46.9 60,72.9
Tx_Coil_Out on Bottom Layer "TX_COIL_OUT_L02_P008" (solid, pour order 8): 55.2,21.8 50.6,21.8 48.1,24.3 48.1,26.8 46.3,28.6 46.3,31.1 46.8,31.6 55.9,31.6 57,30.5 57,23.4

## Silkscreen, mask and mechanical layers (free items; w line width, h text height)
Mechanical 1:
  lines w0.2: 0,60 0,72.9 ; 0,72.9 60,72.9 60,0 0,0 0,72.9

## Text inside footprints (layer, text, board x,y; h text height)
J1: Mechanical 13 "PCB EDGE" at 35.9,-1.1 h0.81
MCU1: Top Overlay "*" at 45.593,26.347 h1.27 r180; Mechanical 13 "*" at 44.272,27.544 h1.27 r180